# Altium PCB PCB.PcbDoc
Units mil, origin at the board's own origin, x right, y up, seen from the top; angles counter-clockwise.
Board outline 3045.59 x 1683.67 mil, 2 copper layers (Top Layer, Bottom Layer), stack 61.855 mil thick; 72 components, 68 nets, 264 pads, 93 vias.
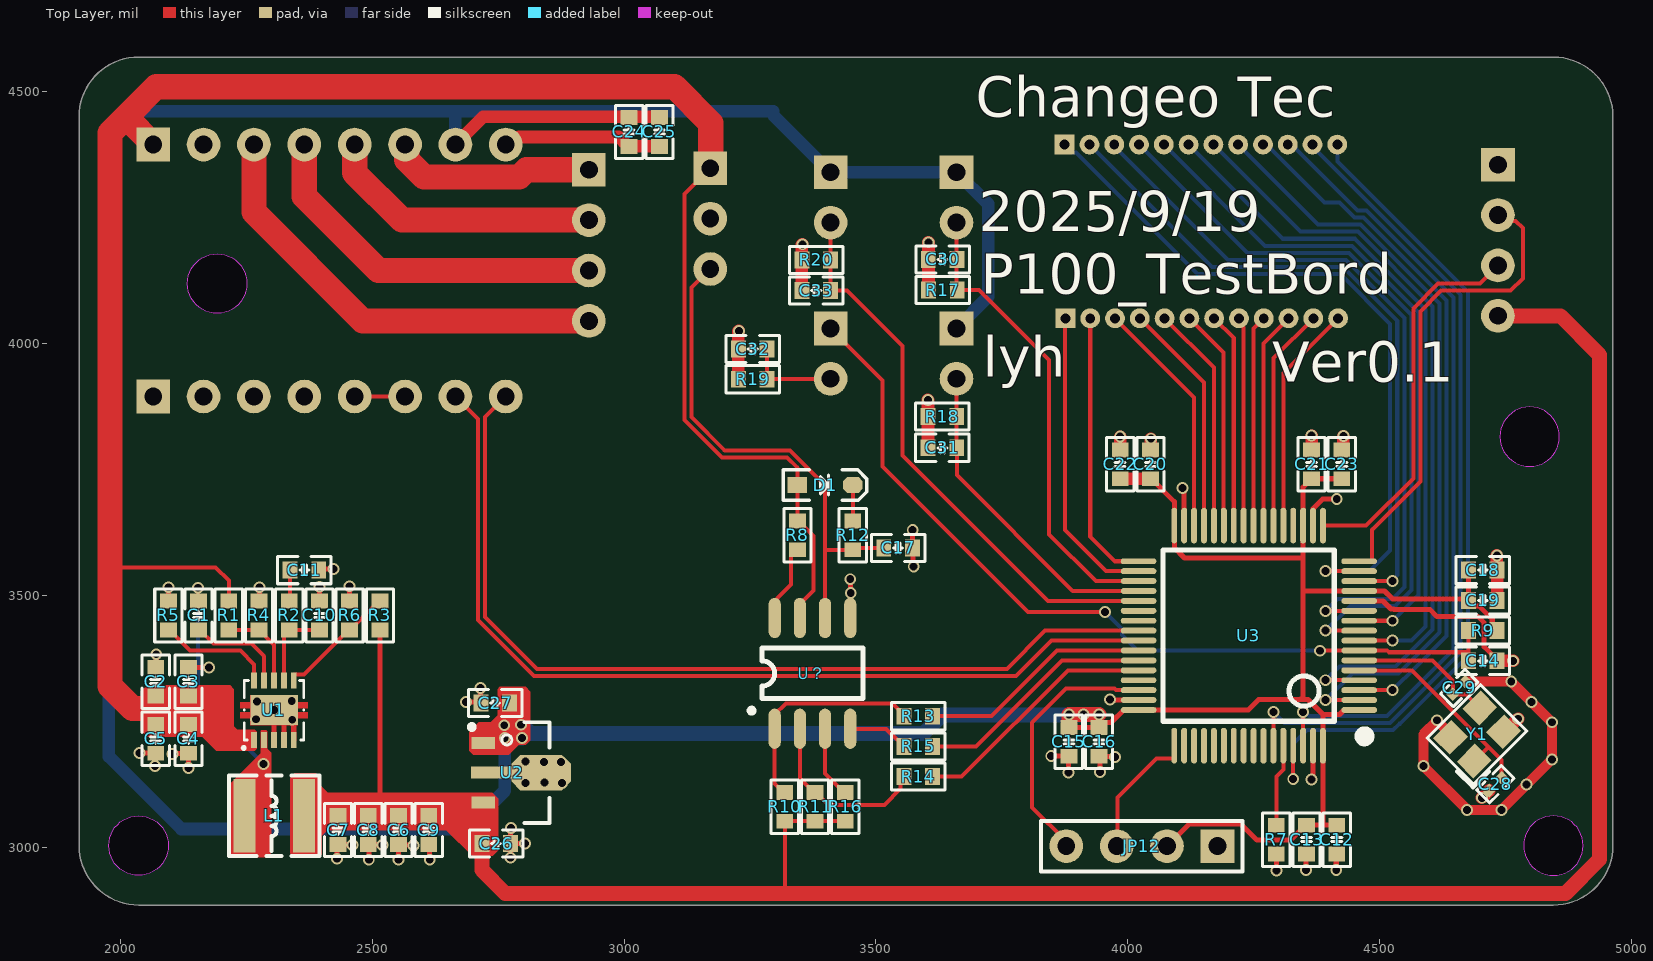
[diagram p0: Top Layer view]
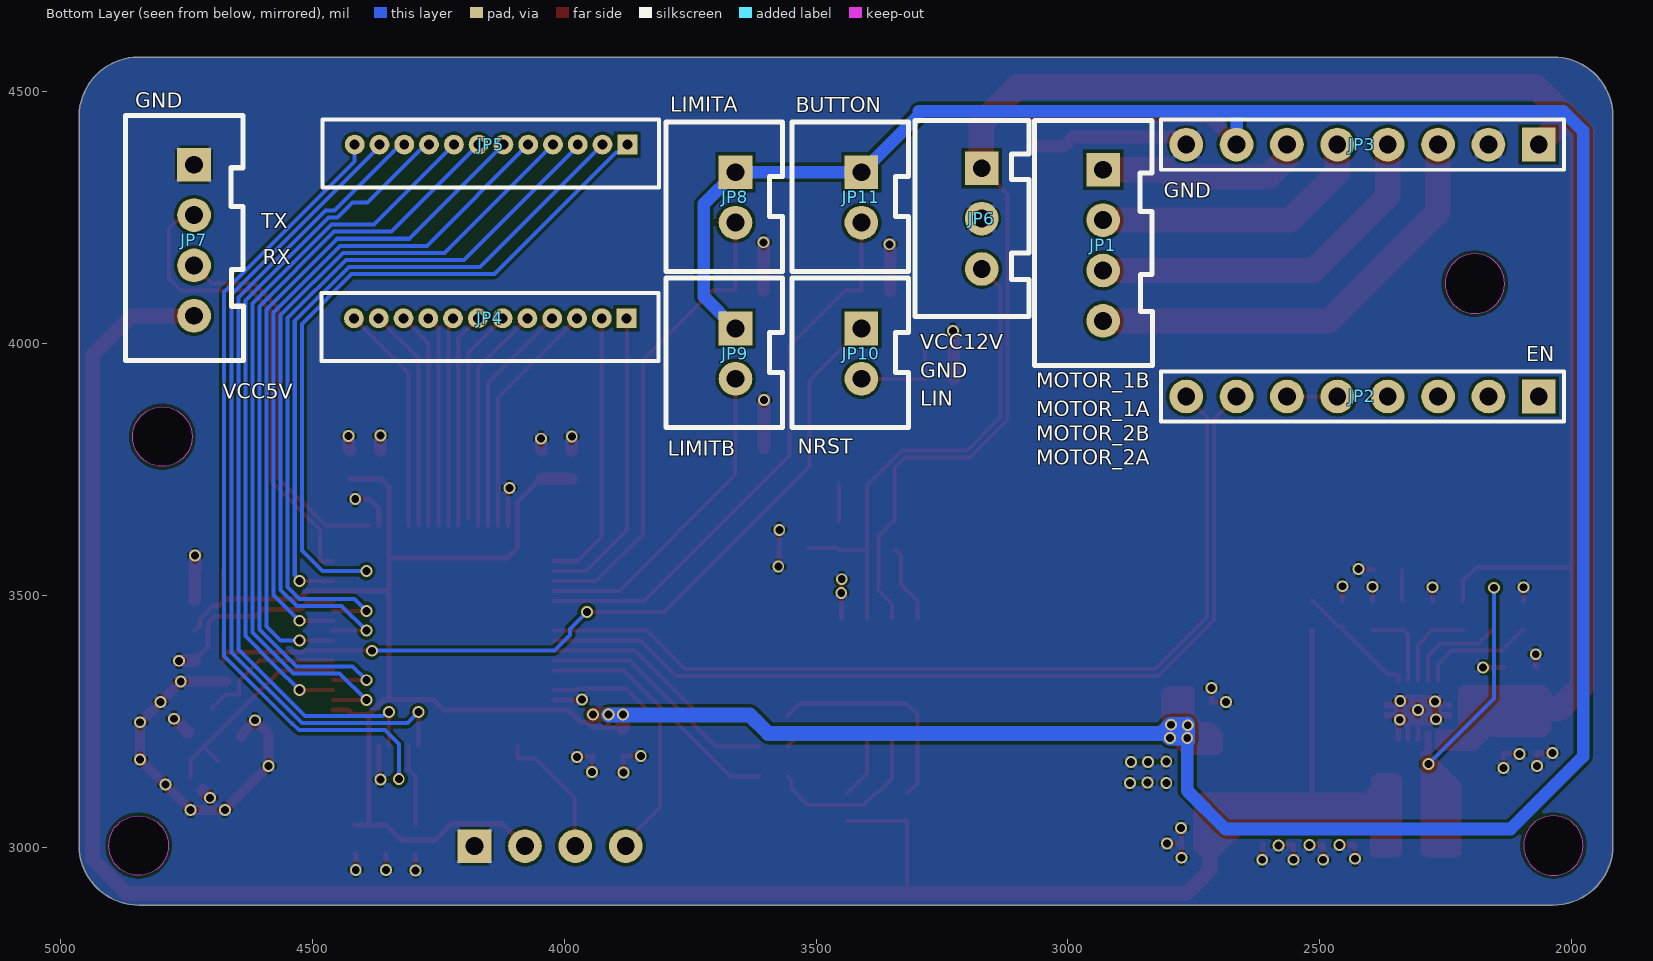
[diagram p1: Bottom Layer view, seen from below]

## Layer stack, top to bottom
Top Solder: solder mask 0.4, Solder Resist, Dk 3.5
Top Layer: signal copper 1.4
Dielectric 1: dielectric 59.0551, FR-4, Dk 4.8
Bottom Layer: signal copper 1.4
Bottom Solder: solder mask 0.4, Solder Resist, Dk 3.5

## Board outline
1917.76,3003.19 1917.76,4450.63 cw(c2035.87,4450.63) 2035.87,4568.74 4845.24,4568.74 cw(c4845.24,4450.63) 4963.35,4450.63 4963.35,3003.19 cw(c4845.24,3003.19) 4845.24,2885.08 2035.87,2885.08 cw(c2035.87,3003.19)
cut-out: 2192,4059.94 cw(c2192,4119) 2132.94,4119 cw(c2192,4119) 2192,4178.06 cw(c2192,4119) 2251.06,4119 cw(c2192,4119)
cut-out: 4738.94,3815 ccw(c4798,3815) 4798,3755.94 ccw(c4798,3815) 4857.06,3815 ccw(c4798,3815) 4798,3874.06 ccw(c4798,3815)
cut-out: 4786.18,3003.19 ccw(c4845.24,3003.19) 4845.24,2944.13 ccw(c4845.24,3003.19) 4904.29,3003.19 ccw(c4845.24,3003.19) 4845.24,3062.24 ccw(c4845.24,3003.19)
cut-out: 2035.87,2944.13 cw(c2035.87,3003.19) 1976.81,3003.19 cw(c2035.87,3003.19) 2035.87,3062.24 cw(c2035.87,3003.19) 2094.92,3003.19 cw(c2035.87,3003.19)

## Design rules (kind name [scope] priority, off if disabled: settings)
Clearance [All] p1: gap=6 ignorepadtopadclearanceinfootprint=FALSE except(0: Arc-Text Arc-Hole Track-Text Track-Hole SMDPad-Text SMDPad-Hole THPad-Text THPad-Hole Via-Text Via-Hole Fill-Text Fill-Hole Poly-Text Poly-Hole Region-Text Region-Hole Text-Text Text-Hole; 10: Via-Via)
PolygonConnect [All] p1: connectstyle=Relief reliefconductorwidth=10 reliefentries=4 polygonreliefangle="45 Angle" airgapwidth=4
RoutingVias [All] p1: holewidth=15.75 width=23.62 viastyle="Through Hole" minholewidth=11.81 minwidth=19.68 maxholewidth=15.75 maxwidth=39.37
SilkToSolderMaskClearance [IsPad] p1: minsilkscreentomaskgap=0 clearancetoexposedcopper=TRUE
SolderMaskExpansion [IsVia] p1: expansion=1 istentingtop=TRUE useseparateexpansions=TRUE expansionbottom=1 istentingbottom=TRUE soldermaskfromhole=TRUE
Width [All] p1: maxlimit=100 minlimit=6 preferedwidth=10
29 further rules are at their usual default settings.

## Classes and differential pairs
component class PWR: C1 C2 C3 C4 C5 C6 C7 C8 C9 C10 C11 C26 C27 L1 R1 R2 R3 R4 R5 R6 U1 U2
component class MCU: C12 C13 C14 C15 C16 C17 C18 C19 C20 C21 C22 C23 C28 C29 D1 R7 R8 R9 R10 R11 R12 R13 R14 R15 R16 U3 U？ Y1
component class Connector: C24 C25 C30 C31 C32 C33 JP1 JP2 JP3 JP4 JP5 JP6 JP7 JP8 JP9 JP10 JP11 JP12 R17 R18 R19 R20

## Components (designator, comment, footprint, x,y, rotation, side; value= is the part's Value field where it differs from the comment)
C1 "100nF/25V" C0603_L 2155,3460 r270 top
C2 "10uF/25V" C0603_L 2070,3328.54 r270 top
C3 "10uF/25V" C0603_L 2135,3328.54 r270 top
C4 "1uF/25V" C0603_L 2135,3215 r90 top
C5 "3.3nF/25V" C0603_L 2070,3215 r90 top
C6 "22uF/16V" C0603_L 2552,3034 r90 top
C7 "22uF/16V" C0603_L 2432,3034 r90 top
C8 "22uF/16V" C0603_L 2492,3034 r90 top
C9 "22uF/16V" C0603_L 2612,3034 r90 top
C10 "68pF/25V" C0603_L 2395,3460 r270 top
C11 "560pF/25V" C0603_L 2365,3550 r180 top
C12 "1uF/10V" C0603_L 4415,3015 r270 top
C13 "1uF/10V" C0603_L 4355,3015 r270 top
C14 "100nF/25V" C0603_L 4705,3370 r180 top
C15 "1uF/10V" C0603_L 3883,3209 r90 top
C16 "1uF/10V" C0603_L 3943,3209 r90 top
C17 "220pF/25V" C0603_L 3544,3594 r180 top
C18 "1uF/10V" C0603_L 4705,3550 r180 top
C19 "10nF/10V" C0603_L 4705,3490 r180 top
C20 "1uF/10V" C0603_L 4045,3760 r270 top
C21 "1uF/10V" C0603_L 4365,3760 r90 top
C22 "1uF/10V" C0603_L 3985,3760 r270 top
C23 "10nF/10V" C0603_L 4425,3760 r90 top
C24 "22uF/16V" C0603_L 3010,4420 r90 top
C25 "2.2uF/16V" C0603_L 3070,4420 r90 top
C26 "330nF/16V" C0603_L 2746,3007 r180 top
C27 "100nF/16V" C0603_L 2744,3286 r0 top
C28 "22pF/16V" C0402_L 4730,3125 r225 top
C29 "22pF/16V" C0402_L 4658,3316 r45 top
C30 "100nF/10V" C0603_L 3632.46,4167 r180 top
C31 "100nF/10V" C0603_L 3632,3793 r180 top
C32 "100nF/10V" C0603_L 3255.46,3989 r180 top
C33 "100nF/10V" C0603_L 3381.46,4105 r180 top
D1 "1N5819" SOD-323 3399,3719 r0 top
JP1 "HDR-1X4" XH2.54-LI-4P 2930,4195 r270 bottom
JP2 "HDR-1X8" HDR2.54-M-LI-8P 2415,3894.8 r0 bottom
JP3 "HDR-1X8" HDR2.54-M-LI-8P 2415,4395 r0 bottom
JP4 "HDR-1X12" MX1.25-L-12P 4147.36,4050 r0 bottom
JP5 "HDR-1X12" MX1.25-L-12P 4145.79,4395 r0 bottom
JP6 "HDR-1X3" XH2.54-LI-3P 3171,4248 r270 bottom
JP7 "HDR-1X4" XH2.54-LI-4P 4735,4205 r270 bottom
JP8 "HDR-1X2" XH2.54-LI-2P 3660,4290 r270 bottom
JP9 "HDR-1X2" XH2.54-LI-2P 3660,3980 r270 bottom
JP10 "HDR-1X2" XH2.54-LI-2P 3410,3980 r270 bottom
JP11 "HDR-1X2" XH2.54-LI-2P 3410,4290 r270 bottom
JP12 "HDR-1X4" HDR2.54-LI-4P 4028,3002 r180 top
L1 "8.2uH" NR4020 2305,3062 r0 top
R1 "10K 1%" R0603_L 2215,3460 r270 top
R2 "18.7K 1%" R0603_L 2335,3460 r90 top
R3 "100K 1%" R0603_L 2515,3460 r90 top
R4 "10K 1%" R0603_L 2275,3460 r90 top
R5 "95.3K 1%" R0603_L 2095,3460 r90 top
R6 "19.1K 1%" R0603_L 2455,3460 r90 top
R7 "10K 1%" R0603_L 4295,3015 r270 top
R8 "0R 1%" R0603_L 3344,3619 r270 top
R9 "10K 1%" R0603_L 4705,3430 r0 top
R10 "2.2K 1%" R0603_L 3319,3080 r270 top
R11 "2.2K 1%" R0603_L 3379,3080 r270 top
R12 "1K 1%" R0603_L 3454,3619 r90 top
R13 "100R 1%" R0603_L 3584,3260 r180 top
R14 "100R 1%" R0603_L 3584,3140 r180 top
R15 "100R 1%" R0603_L 3584,3200 r180 top
R16 "5.1K 1%" R0603_L 3439,3080 r270 top
R17 "10K 1%" R0603_L 3632.91,4106 r180 top
R18 "10K 1%" R0603_L 3632,3855 r180 top
R19 "10K 1%" R0603_L 3255.46,3929 r180 top
R20 "10K 1%" R0603_L 3381.46,4166 r180 top
U1 "TPS54335A-QFN" VSON-10_L3.0-W3.0-P0.50-TL-EP 2304.64,3271.94 r90 top
U2 "78L33" SOT89_L 2732,3148 r270 top
U3 "STM32F103R6TX_LQFP64" "LQFP64 10x10_N" 4240,3420 r90 top
U？ "SI1021T" SOP8 3298,3236 r90 top
Y1 "8Mhz" "OSC 3225-4P" 4693.46,3223.66 r45 top

## Footprints (in the part's own frame and the unit in brackets; to place one, negate y for a bottom-side part, rotate by r counter-clockwise, add the part's x,y. Pads: shape width x height; smd on the part's side, far side on the other; paste and mask are expansions set on the pad)
C0402_L [mm] "贴片MLCC电容"
  rect 0.5x0.5 smd: 1(-0.45,0) 2(0.45,0)
  silkscreen extent -0.87,-0.46 0.88,0.46, body extent -0.5,-0.25 0.5,0.25, height 0.5
C0603_L [mm] "贴片MLCC电容"
  rect 0.75x0.85 smd: 1(-0.725,0) 2(0.725,0)
  silkscreen extent -1.35,-0.69 1.35,0.69, body extent -0.8,-0.4 0.8,0.4, height 0.8
HDR2.54-LI-4P [mm] "排针，4脚"
  rect 1.7x1.7 hole 0.9: 1(-3.81,0)
  round 1.7 hole 0.9: 2(-1.27,0) 3(1.27,0) 4(3.81,0)
  silkscreen extent -5.08,-1.27 5.08,1.27, body extent -5.08,-1.27 5.08,1.27, height 8.5
HDR2.54-M-LI-8P [mm] "排母，8脚"
  rect 1.7x1.7 hole 0.9: 1(-8.89,0)
  round 1.7 hole 0.9: 2(-6.35,0) 3(-3.81,0) 4(-1.27,0) 5(1.27,0) 6(3.81,0) 7(6.35,0) 8(8.89,0)
  silkscreen extent -10.16,-1.27 10.16,1.27, body extent -10.16,-1.27 10.16,1.27, height 8.5
"LQFP64 10x10_N" [mm] "64脚，体宽10x10mm，脚距0.5mm"
  oval 0.3x1.8 smd: 1(-3.75,-5.575) 2(-3.25,-5.575) 3(-2.75,-5.575) 4(-2.25,-5.575) 5(-1.75,-5.575) 6(-1.25,-5.575) 7(-0.75,-5.575) 8(-0.25,-5.575) 9(0.25,-5.575) 10(0.75,-5.575) 11(1.25,-5.575) 12(1.75,-5.575) 13(2.25,-5.575) 14(2.75,-5.575) 15(3.25,-5.575) 16(3.75,-5.575) 33(3.75,5.55) 34(3.25,5.55) 35(2.75,5.55) 36(2.25,5.55) 37(1.75,5.55) 38(1.25,5.55) 39(0.75,5.55) 40(0.25,5.55) 41(-0.25,5.55) 42(-0.75,5.55) 43(-1.25,5.55) 44(-1.75,5.55) 45(-2.25,5.55) 46(-2.75,5.55) 47(-3.25,5.55) 48(-3.75,5.55)
  oval 1.8x0.3 smd: 17(5.55,-3.75) 18(5.55,-3.25) 19(5.55,-2.75) 20(5.55,-2.25) 21(5.55,-1.75) 22(5.55,-1.25) 23(5.55,-0.75) 24(5.55,-0.25) 25(5.55,0.25) 26(5.55,0.75) 27(5.55,1.25) 28(5.55,1.75) 29(5.55,2.25) 30(5.55,2.75) 31(5.55,3.25) 32(5.55,3.75) 49(-5.55,3.75) 50(-5.55,3.25) 51(-5.55,2.75) 52(-5.55,2.25) 53(-5.55,1.75) 54(-5.55,1.25) 55(-5.55,0.75) 56(-5.55,0.25) 57(-5.55,-0.25) 58(-5.55,-0.75) 59(-5.55,-1.25) 60(-5.55,-1.75) 61(-5.55,-2.25) 62(-5.55,-2.75) 63(-5.55,-3.25) 64(-5.55,-3.75)
  silkscreen extent -5.33,-6.09 4.32,4.32, body extent -6,-6 6,6, height 1.45
MX1.25-L-12P [mm] "长：16.75mm，宽：3.2mm，高：4.2mm"
  rect 1x1 hole 0.5: 1(-6.885,0)
  round 1 hole 0.5: 2(-5.635,0) 3(-4.385,0) 4(-3.135,0) 5(-1.885,0) 6(-0.635,0) 7(0.615,0) 8(1.865,0) 9(3.115,0) 10(4.365,0) 11(5.615,0) 12(6.865,0)
  silkscreen extent -8.49,-1.27 8.49,2.16, body extent -8.38,-1.15 8.37,2.05, height 4.25
NR4020 [mm] "4.0mm*4.0mm*2.0mm(长*宽*高）"
  rect 1.1x3.7 smd: 1(-1.5,0) 2(1.5,0)
  silkscreen extent -2.29,-2.03 2.29,2.03, body extent -2,-2 2,2, height 2.1
"OSC 3225-4P" [mm] "3.2*2.5*0.7mm(长宽高)"
  rect 1.3x1.2 smd: 1(-1.05,-0.85) 2(1.05,-0.85) 3(1.05,0.85) 4(-1.05,0.85)
  silkscreen extent -2.03,-1.75 1.9,1.65, body extent -1.6,-1.25 1.6,1.25, height 0.7
R0603_L [mm] "1/10W贴片电阻"
  rect 0.75x0.85 smd: 1(-0.725,0) 2(0.725,0)
  silkscreen extent -1.35,-0.69 1.35,0.69, body extent -0.8,-0.4 0.8,0.4, height 0.4
SOD-323 [mm] "1.8x1.3X0.9mm（长宽高，不包括引脚）"
  rect 1x0.8 smd: 1(-1.4,0)
  oct 1x0.8 smd: 2(1.4,0)
  silkscreen extent -2.11,-0.76 2.11,0.76, body extent -1.34,-0.63 1.31,0.67, height 1
SOP8 [mil] "联系卖家 免费查找封装"
  oval 80x24 smd: 1(-1,-1) 2(-1,-51) 3(-1,-101) 4(-1,-151) 5(219,-151) 6(219,-101) 7(219,-51) 8(219,-1)
  silkscreen extent 30,-176 159,50, body extent -12,-173 225,24, height 75
SOT89_L [mm] "4.6x4.3x1.6mm(长宽高)"
  rect 0.6x1.2 smd: 1(-1.5,-0.303) 3(1.5,-0.303)
  oct 1.8x3 smd: 2(0,2.616)
  rect 0.6x2.1 smd: 2(0,0.127)
  silkscreen extent -2.54,-1 2.54,3.05, body extent -2.3,-0.88 2.3,3.42, height 1.6
VSON-10_L3.0-W3.0-P0.50-TL-EP [mm]
  rect 0.8x0.3 smd: 1(-1.5,1) 2(-1.5,0.5) 3(-1.5,0) 4(-1.5,-0.5) 5(-1.5,-1) 6(1.5,-1) 7(1.5,-0.5) 8(1.5,0) 9(1.5,0.5) 10(1.5,1)
  rect 1.52x2.4 smd: 11(0.002,-0.009)
  Top Layer region: -0.758,1.191 -0.398,1.191 -0.398,1.706 -0.098,1.706 -0.098,1.191 0.102,1.191 0.102,1.706 0.402,1.706 0.402,1.191 0.761,1.191 0.761,-1.209 0.402,-1.209 0.402,-1.714 0.102,-1.714 0.102,-1.209 -0.098,-1.209 -0.098,-1.714 -0.398,-1.714 -0.398,-1.209 -0.759,-1.209 -0.759,0.886 -0.758,0.886 -0.758,1.191
  silkscreen extent -1.98,-1.5 1.5,1.6, body extent -1.51,-1.52 1.51,1.5, height 0.61
XH2.54-LI-2P [mm] "接插件，2P"
  rect 1.7x1.7 hole 0.9: 1(-1.27,0)
  round 1.7 hole 0.9: 2(1.27,0)
  silkscreen extent -3.81,-3.51 3.74,2.37, body extent -3.77,-3.3 3.77,2.4, height 7.05
XH2.54-LI-3P [mm] "接插件，3P"
  rect 1.7x1.7 hole 0.9: 1(-2.54,0)
  round 1.7 hole 0.9: 2(0,0) 3(2.54,0)
  silkscreen extent -4.95,-3.38 4.93,2.39, body extent -5.04,-3.3 5.04,2.4, height 7.03
XH2.54-LI-4P [mm] "接插件，4P"
  rect 1.7x1.7 hole 0.9: 1(-3.81,0)
  round 1.7 hole 0.9: 2(-1.27,0) 3(1.27,0) 4(3.81,0)
  silkscreen extent -6.3,-3.45 6.07,2.49, body extent -6.31,-3.3 6.31,2.4, height 7.03

## Part data
C1 C2 C3 C4 C5 C6 C7 C8 C9 C10 C11 C12 C13 C14 C15 C16 C17 C18 C19 C20 C21 C22 C23 C24 C25 C26 C27 C28 C29 C30 C31 C32 C33: library part C, "无极性贴片电容", BOM名称=无极性贴片电容, 学习资源=www.ooocke.com, 材质=X7R, 版权归属=源创客
D1: "肖特基二极管", BOM名称=肖特基二极管, 学习资源=www.ooocke.com, 属性=40V/2A, 版权归属=源创客
JP1 JP7 JP12: library part "Header 4", "4P接插件", BOM名称=4P接插件, 学习资源=www.ooocke.com, 版权归属=源创客
JP2 JP3: library part "Header 8", "8P接插件", BOM名称=8P接插件, 学习资源=www.ooocke.com, 版权归属=源创客
JP4 JP5: library part "Header 12", "12P接插件", BOM名称=12P接插件, 学习资源=www.ooocke.com, 版权归属=源创客
JP6: library part "Header 3", "3P接插件", BOM名称=3P接插件, 学习资源=www.ooocke.com, 版权归属=源创客
JP8 JP9 JP10 JP11: library part "Header 2", "2P接插件", BOM名称=2P接插件, 学习资源=www.ooocke.com, 版权归属=源创客
L1: library part L, "小功率贴片电感", BOM名称=小功率贴片电感, 学习资源=www.ooocke.com, 版权归属=源创客
R1 R2 R3 R4 R5 R6 R7 R8 R9 R10 R11 R12 R13 R14 R15 R16 R17 R18 R19 R20: library part R, "贴片电阻", BOM名称=贴片电阻, 学习资源=www.ooocke.com, 版权归属=源创客
U1: "BUCK"
U？: "SI1021T LIN收发器"
Y1: library part Crystal

## Via types
v1: diameter 23.62, hole 15.75, Top Layer to Bottom Layer, 93 vias

## Nets (pads, with @x,y where several pads share a name; then routed paths per layer and width w, separated by ;. In a path a pad name is that pad's centre, name@x,y a point inside that pad or via, vN(x,y) a via of type N, cw(c..) or ccw(c..) an arc to the next point about the centre after c; other vN are vias at no path point)
A4988_DIR: JP2.8 U3.40 | length 1826.5
  Top Layer w8: JP2.8 2724,3853.8 2724,3456.8 2826.8,3354 3760,3354 3835.84,3429.84 U3.40
A4988_EN: JP2.1
A4988_MS1: JP2.2
A4988_MS2: JP2.3
A4988_MS3: JP2.4
A4988_RST: JP2.5 JP2.6 | length 100
  Top Layer w8: JP2.5 JP2.6
A4988_STEP: JP2.7 U3.41 | length 1849
  Top Layer w8: JP2.7 2710,3849.8 2710,3451 2821,3340 3778,3340 3848.16,3410.16 U3.41
BOOT: R7.1 U3.60 | length 163.7
  Top Layer w8: R7.1 4295,3140.17 4308.9,3154.06 U3.60
Button: C33.1 JP11.2 R20.1 U3.37 | length 1128.8
  Top Layer w8: JP11.2 C33.1 3443,4105 3553,3995 3553,3778 3842.1,3488.9 U3.37
GND: C2.1 C3.1 C4.1 C5.1 C6.1 C7.1 C8.1 C9.1 C10.1 C11.1 C12.2 C13.2 C14.1 C15.1 C16.1 C17.1 C18.1 C19.1 C20.1 C21.2 C22.1 C23.2 C24.1 C25.1 C26.1 C27.1 C28.2 C29.2 C30.2 C31.2 C32.2 C33.2 JP3.2 JP3.8 JP6.2 JP7.1 JP12.1 R4.2 R5.2 R6.2 R7.2 R17.2 R18.2 R19.2 R20.2 U1.3 U1.4 U1.5 U1.11 U2.2 U3.12 U3.18 U3.31 U3.47 U3.63 U？.5 Y1.2 Y1.4 | length 3620.3
  Top Layer w10: v1(2038,3187) 2038.27,3186.73 2069.73,3186.73 C5.1 2068.43,3184.89 v1(2068.43,3161.43) ; C2.1 2071,3358.09 v1(2071,3383) ; R5.2 v1(2095,3516) ; v1(2103,3185) 2103.73,3185.73 2134.27,3185.73 C4.1 v1(2135,3157) ; C3.1 2175.72,3357.09 v1(2175.81,3357) ; R4.2 2276,3489.54 v1(2276,3516) ; U1.3 2304.65,3257.65 U1.11@2306,3259 ; U1.11@2320,3268 2324.33,3263.67 U1.4 ; U1.11@2334,3271 2344.02,3260.98 U1.5 ; C11.1 2395.54,3552 v1(2423,3552) ; C10.1 v1(2395,3517) ; v1(2430,2977) 2430,3003.46 C7.1 2432.73,3004.73 2460.27,3004.73 v1(2461,3004) ; R6.2 v1(2455,3518) ; C8.1 C8.1@2492.73,3004.73 ; v1(2493,2975) 2493,3004.46 C8.1@2492.73,3004.73 ; v1(2520,3004) 2519.27,3004.73 C8.1@2492.73,3004.73 ; v1(2552,2975) C6.1 2553.23,3004.23 2580.77,3004.23 v1(2582,3003) ; C9.1 2614,3003.46 v1(2614,2975) ; v1(2686,3288) 2713.46,3288 C27.1@2715.23,3286.23 ; v1(2715,3316) 2715.23,3315.77 C27.1@2715.23,3286.23 ; C27.1 C27.1@2715.23,3286.23 ; v1(2774,2979) 2774.27,2979.27 2774.27,3006.73 C26.1 ; v1(2775,3038) 2774.77,3037.77 2774.77,3007.23 C26.1 ; v1(2803,3007) C26.1 ; U？.5 3449.5,3455.5 3449.5,3504.5 v1(3450,3505) 3449.5,3505.5 3449.5,3531.5 v1(3449,3532) ; v1(3573,3630) 3572.77,3629.77 3572.77,3594.23 C17.1 3573.77,3592.77 3573.77,3558.23 v1(3575,3557) ; v1(3848,3181) 3848.27,3180.73 3882.73,3180.73 C15.1 3882,3179.46 v1(3882,3148) ; C16.1 C16.1@3943.73,3179.73 ; v1(3945,3149) 3945,3178.46 C16.1@3943.73,3179.73 ; v1(3965,3293) 3965.61,3292.39 4021.15,3292.39 U3.47 ; v1(3975,3179) 3974.27,3179.73 C16.1@3943.73,3179.73 ; v1(4109,3713) 4109,3709.31 4112.05,3706.27 U3.31 ; v1(4295,2954) R7.2 ; v1(4354,2955) 4354,2985.46 C13.2 ; v1(4364.83,3134) 4364.83,3137.69 4367.95,3140.81 U3.63 ; U3.18 4368.3,3638.85 4368.3,3672.6 4386.7,3691 v1(4415,3691) ; v1(4414,2955) 4414,2985.46 C12.2 ; U3.12 4506.99,3488.9 4522.89,3473 4528,3473 4528.71,3472.29 4599.65,3472.29 4614.21,3457.73 4695.78,3457.73 4707.78,3445.73 4707.78,3397.73 4733.54,3371.97 C14.1
  Top Layer w20: v1(4614,3252) v1@4614,3251.02 ; Y1.4 4640.57,3224.45 v1@4614,3251.02 ; C29.2 v1(4761.47,3328.53) v1(4842,3248) v1(4842,3174) v1(4742,3074) v1(4674,3074) v1(4587,3161) 4587,3224.02 v1@4614,3251.02
  Top Layer w25: JP3.8 2776.35,4395 2791.35,4410 2989.49,4410 3005.77,4393.72 3007.74,4393.72 C24.1 C25.1 ; R19.2 C32.2 3226.91,4023.91 v1(3228,4025) ; C33.2 3352.91,4195.91 v1(3354,4197) ; v1(3603,3888) 3603.46,3887.54 C31.2 ; v1(3604,4201) 3604.37,4200.63 R17.2 ; C22.1 v1(3985,3815) ; C20.1 4046,3789.54 v1(4046,3811) ; C21.2 v1(4365,3817) ; C23.2 4425.74,3788.54 4428,3790.81 v1(4428,3816) ; v1(4703,3098) C28.2 ; v1(4733,3579) 4733,3550.54 C18.1 C19.1 ; C14.1 v1(4765,3370) ; Y1.2 4749.23,3229.23 v1(4775,3255)
  other v1: 4792,3124 2804.56,3127 2876.56,3127 2841.56,3128 2840.56,3169 2874.56,3169 2804.56,3170 2341.09,3252.91 2269.09,3253.91 2305.09,3271.91 4801.74,3288.26 2271.09,3288.91 2340.09,3289.91
Limit_A: C30.1 JP8.2 R17.1 U3.35 | length 936.6
  Top Layer w8: JP8.2 3660,4107.46 R17.1 3705,4106 3844,3967 3844,3621 3936.73,3528.27 U3.35
Limit_B: C31.1 JP9.2 R18.1 U3.36 | length 647.7
  Top Layer w8: JP9.2 3660,3803.54 3660.54,3803 C31.1 3660.54,3738.81 3890.77,3508.58 U3.36
LIN_BUS: C17.2 JP6.3 R12.1 U？.6 | length 1011.7
  Top Layer w8: JP6.3 3134,4111 3134,3853.8 3199.8,3788 3329,3788 3399,3718 3399,3590.46 ; U？.6 3399,3590.46 ; C17.2 3457.54,3594 R12.1 3399,3590.46
MOTOR_1A: JP1.2 JP3.5 | length 559.9
  Top Layer w50: JP3.5 2465,4339 2559,4245 JP1.2
MOTOR_1B: JP1.1 JP3.6 | length 413.3
  Top Layer w50: JP3.6 2568.24,4391.76 2568.24,4365.05 2602.75,4330.54 2791.7,4330.54 2806.17,4345 JP1.1
MOTOR_2A: JP1.3 JP3.4 | length 728.9
  Top Layer w50: JP3.4 2365,4292 2512,4145 JP1.3
MOTOR_2B: JP1.4 JP3.3 | length 888.5
  Top Layer w50: JP3.3 2265,4261 2481,4045 JP1.4
NetC1_1: C1.1 L1.1 U1.2 | length 479
  Top Layer w8: v1(2154,3515) 2154,3489.54 C1.1 ; v1(2284,3165) 2284.48,3165.48 2284.48,3212.41 U1.2
  Bottom Layer w8: v1(2154,3515) 2154,3295 v1(2284,3165)
NetC1_2: C1.2 U1.9 | length 199.7
  Top Layer w8: C1.2 2156.97,3431.46 2184.43,3404 2260,3404 2284.96,3379.04 U1.9
NetC10_2: C10.2 R2.1 U1.7 | length 164.9
  Top Layer w8: U1.7 2324.33,3420.79 R2.1 C10.2
NetC11_2: C11.2 R2.2 | length 62.1
  Top Layer w8: R2.2 2336.46,3490 C11.2
NetC32_1: C32.1 JP10.2 R19.1 | length 186.4
  Top Layer w8: C32.1 R19.1 3285,3930 JP10.2
NetD1_2: D1.2 R12.2 | length 71.5
  Top Layer w8: R12.2 3454.12,3647.66 D1.2
NetR1_2: R1.2 R4.1 U1.8 | length 173.9
  Top Layer w8: R1.2 R4.1 2276.97,3431.46 2287.73,3420.69 2287.73,3418.72 2304.65,3401.81 U1.8
NetR5_1: R5.1 U1.10 | length 230.5
  Top Layer w8: R5.1 2096.97,3431.46 2138.43,3390 2238,3390 2265.28,3362.72 U1.10
NetR8_2: R8.2 U？.8 | length 155.2
  Top Layer w8: U？.8 3299,3487.33 3304.97,3493.3 3304.97,3494.97 3331.27,3521.27 3331.27,3579.69 3342.03,3590.46 R8.2
NetR10_1: R10.1 R13.2 U？.1 | length 441
  Top Layer w8: R10.1 3317.03,3108.54 3299,3126.57 U？.1 3299,3263 3321,3285 3532.43,3285 3555.46,3261.97 R13.2
NetR11_1: R11.1 R14.2 U？.2 | length 360.3
  Top Layer w8: U？.2 3349,3136.57 3377.03,3108.54 R11.1 3380.97,3108.54 3405.73,3083.78 3516.78,3083.78 3548.95,3115.95 3548.95,3133.5 R14.2
NetR15_2: R15.2 U？.4 | length 122.1
  Top Layer w8: U？.4 3520.46,3235 3542.72,3212.73 3544.69,3212.73 3555.46,3201.97 R15.2
NetR16_1: R16.1 U？.3 | length 144.2
  Top Layer w8: U？.3 3399,3146.57 3437.03,3108.54 R16.1
NRST: C14.2 JP10.1 R9.1 U3.7 | length 1699.6
  Top Layer w8: JP10.1 3513,3927 3513,3756 3801.91,3467.09 v1(3955,3467.09) ; v1(4382,3390) 4382.24,3390.24 4459.27,3390.24 U3.7 4514.8,3390.47 4518.27,3387 4672.73,3387 4674.49,3385.25 4676.46,3385.25 C14.2 ; 4676.46,3387 R9.1
  Bottom Layer w8: v1(3955,3467.09) 3988.82,3433.27 3988.82,3420.83 4019.65,3390 v1(4382,3390)
PART1_ID1: JP5.1 U3.15 | length 1455.4
  Top Layer w8: v1(4393,3548) U3.15
  Bottom Layer w8: JP5.1 3890.41,4379.31 3897.64,4379.31 4138.96,4138 4422,4138 4521.13,4038.87 4521.13,3589.13 4480,3548 v1(4393,3548)
PART1_ID2: JP5.2 U3.14 | length 1343.1
  Top Layer w8: U3.14@4459.53,3528.24 v1(4526.01,3528.22)
  Bottom Layer w8: JP5.2 4166.94,4152 4427.8,4152 4535.13,4044.66 4535.13,3540.72 4526.01,3531.59 v1(4526.01,3528.22)
PART1_ID3: JP5.3 U3.11 | length 1496.5
  Top Layer w8: v1@4393.02,3469.24 U3.11
  Bottom Layer w8: JP5.3 3973.15,4391.85 4199,4166 4433.6,4166 4549.13,4050.46 4549.13,3516.82 4525.31,3493 4416.74,3493 v1(4393,3469.26)
PART2_ID1: JP4.10 U3.23 | length 432.1
  Top Layer w8: U3.23 4269.53,4000.31 JP4.10
PART2_ID2: JP4.11 U3.22 | length 444.3
  Top Layer w8: U3.22 4289.21,3970.79 JP4.11
PART2_ID3: JP4.12 U3.21 | length 456.5
  Top Layer w8: U3.21 4308.9,3941.26 JP4.12
PART3_ID1: JP5.4 U3.9 | length 1496.6
  Top Layer w8: v1(4393,3429.89) U3.9@4459.48,3429.87
  Bottom Layer w8: JP5.4 4237.36,4180 4439.4,4180 4554.01,4065.39 4563.13,4056.26 4563.13,3511.02 4531.11,3479 4442.11,3479 v1(4393,3429.89)
PART3_ID2: JP5.5 U3.10 | length 1343.7
  Top Layer w8: U3.10 v1(4526.01,3449.48)
  Bottom Layer w8: JP5.5 4272.57,4194 4445.2,4194 4577.13,4062.06 4577.13,3500.61 v1(4526.01,3449.48)
PART3_ID3: JP5.6 U3.8 | length 1378.7
  Top Layer w8: U3.8@4459.53,3410.13 v1(4525.98,3410.13)
  Bottom Layer w8: JP5.6 4307.79,4208 4450.99,4208 4591.13,4067.86 4591.13,3438.26 4563,3410.13 v1(4525.98,3410.13)
PART4_ID1: JP4.7 U3.26 | length 427.6
  Top Layer w8: JP4.7 4210.47,4011.1 U3.26
PART4_ID2: JP4.8 U3.25 | length 415.4
  Top Layer w8: JP4.8 4220.79,4041.51 4230.16,4032.14 U3.25
PART4_ID3: JP4.9 U3.24 | length 419.8
  Top Layer w8: U3.24 4249.84,4029.84 JP4.9
PART5_ID1: JP5.7 U3.4 | length 1529.9
  Top Layer w8: v1@4393.02,3331.44 U3.4
  Bottom Layer w8: JP5.7 4343,4222 4456.79,4222 4605.13,4073.66 4605.13,3432.47 4531.67,3359 4420.54,3359 v1(4393,3331.46)
PART5_ID2: JP5.8 U3.2 | length 1531.8
  Top Layer w8: v1(4393,3292.09) U3.2@4459.48,3292.07
  Bottom Layer w8: JP5.8 4378.21,4236 4462.59,4236 4619.13,4079.46 4619.13,3426.67 4537.47,3345 4445.91,3345 v1(4393,3292.09)
PART5_ID3: JP5.9 U3.3 | length 1377.5
  Top Layer w8: U3.3 v1(4526.01,3311.68)
  Bottom Layer w8: JP5.9 4275.66,4395 4390.66,4280 4420.07,4280 4450.07,4250 4468.39,4250 4633.13,4085.26 4633.13,3418.93 4572.92,3358.71 4572.92,3358.59 v1(4526.01,3311.68)
PART6_ID1: JP4.4 U3.29 | length 464.3
  Top Layer w8: JP4.4 4151.42,3922.52 U3.29
PART6_ID2: JP4.5 U3.28 | length 452.1
  Top Layer w8: JP4.5 4171.1,3952.05 U3.28
PART6_ID3: JP4.6 U3.27 | length 423.9
  Top Layer w8: JP4.6@4122.21,4049.85 4190,3982.06 U3.27@4190,3654
PART7_ID1: JP5.10 U3.62 | length 1577.5
  Top Layer w8: U3.62 v1(4348.31,3268)
  Bottom Layer w8: JP5.10 4324.87,4395 4455.87,4264 4474.19,4264 4647.13,4091.06 4647.13,3392.13 4515.19,3260.19 4360.35,3260.19 4352.54,3268 v1(4348.31,3268)
PART7_ID2: JP5.11 U3.59 | length 1636
  Top Layer w8: U3.59 v1@4289.24,3267.98
  Bottom Layer w8: v1(4289.26,3268) 4311.07,3246.19 4520.99,3246.19 4661.13,3386.34 4661.13,4096.85 4366.85,4391.14 JP5.11
PART7_ID3: JP5.12 U3.61 | length 1678.2
  Top Layer w8: v1@4328.56,3135.02 U3.61
  Bottom Layer w8: v1(4328.54,3134.99) 4328.54,3204.54 4356.19,3232.19 4526.79,3232.19 4539.6,3245 4541,3245 4675.13,3379.13 4675.13,4102.65 4416.06,4361.73 JP5.12
PART8_ID1: JP4.1 U3.34 | length 601
  Top Layer w8: JP4.1 3875,4048.7 3875,3630 3957.05,3547.95 U3.34
PART8_ID2: JP4.2 U3.33 | length 549.7
  Top Layer w8: JP4.2 3925.51,3616.49 3974.36,3567.64 U3.33
PART8_ID3: JP4.3 U3.30 | length 476.5
  Top Layer w8: JP4.3 4074,3950.72 4131.73,3892.99 U3.30
Screen_RX: JP7.3 U3.17 | length 759.2
  Top Layer w8: U3.17 4473.5,3638.5 4567,3732 4567,4069.8 4616.2,4119 4699,4119 JP7.3
Screen_TX: JP7.2 U3.16 | length 952
  Top Layer w8: U3.16 4483.24,3567.64 4485,3569.4 4485,3630.2 4581,3726.2 4581,4064 4622,4105 4760.45,4105 4785,4129.55 4785,4229 4770.28,4243.72 4746.28,4243.72 JP7.2
SI1021_RX: R13.1 U3.42 | length 463
  Top Layer w8: R13.1 3729,3260 3859.47,3390.47 U3.42
SI1021_SLP: R14.1 U3.44 | length 496.4
  Top Layer w8: R14.1 3670,3140 3881,3351 4021.39,3351 U3.44
SI1021_TX: R15.1 U3.43 | length 479.7
  Top Layer w8: R15.1 3699,3200 3869.79,3370.79 U3.43
SWCLK: JP12.3 U3.49 | length 266.6
  Top Layer w8: JP12.3 3980,3004 3980,3099 4056.97,3175.97 4090.6,3175.97 4092.36,3177.73 U3.49
SWDIO: JP12.4 U3.46 | length 514
  Top Layer w8: JP12.4 3878,3011 3810,3079 3810,3247 3877.81,3314.81 3974.03,3314.81 3977.11,3311.73 U3.46
VCC3V3: C12.1 C13.1 C15.2 C16.2 C18.2 C19.2 C20.2 C21.1 C22.2 C23.1 C24.2 C25.2 C27.2 JP3.7 JP8.1 JP9.1 JP11.1 JP12.2 R9.2 U2.1 U3.1 U3.13 U3.19 U3.32 U3.48 U3.64 | length 8973.1
  Top Layer w10: C15.2 3913,3237.54 ; v1(3912,3263) 3913,3262 3913,3237.54 ; v1(3943,3263) C16.2 ; C20.2 4046.97,3731.46 4092.36,3686.06 4092.36,3594.75 4112.86,3574.25 4348.27,3574.25 ; JP12.2 4122.46,3046.46 4223.84,3046.46 4256.3,3014 4323.49,3014 4353.03,3043.54 C13.1 4385,3043.54 ; C12.1 4385,3043.54 ; C23.1 C21.1 4363.03,3731.46 4353.27,3721.69 4353.27,3719.72 4348.27,3714.72 U3.19 4348.27,3574.25 ; U3.1 4429.49,3272.36 4420.49,3263.36 4387.64,3263.36 ; C19.2@4673.46,3493 4525.52,3493 4509.94,3508.58 U3.13 4349.69,3508.58 4348.27,3510 ; C19.2 4676.46,3488.18 4686.22,3478.42 4697.72,3478.42 4723.78,3452.36 4723.78,3439.76 R9.2 ; C19.2@4676.46,3493 C18.2 ; 3913,3237.54 C16.2 ; C16.2 3952.76,3247.31 3966.91,3247.31 3991.97,3272.36 U3.48 4239.36,3272.36 4260,3293 4343,3293 ; 4343,3293 4358,3293 4387.64,3263.36 ; 4343,3293 4348.27,3298.27 4348.27,3510 ; 4348.27,3510 4348.27,3574.25 ; 4385,3043.54 4387.64,3046.18 U3.64 4387.64,3263.36
  Top Layer w25: JP3.7 2720.54,4450.54 2850,4450.54 ; 2911,4450.54 2850,4450.54 ; C25.2 3068,4450.54 2850,4450.54 ; C22.2 C20.2
  Top Layer w30: C15.2 v1(3883,3263) v1(3912,3263) v1(3943,3263)
  Bottom Layer w25: JP3.7 2665,4461 ; v1@2763,3211 2763,3112 2687,3036 2121,3036 1977,3180 1977,4422 2016,4461 3296.02,4461 3296.02,4453.98 JP11.1 JP8.1 3723,4277 3723,4093 JP9.1
  Bottom Layer w30: v1@2763,3211 v1(2763,3217) ; v1@3912,3262 3631,3262 3595,3226 2814,3226 ; v1(2763,3217) 2763,3244 2764,3243 v1(2795,3243) 2797,3243 2814,3226 ; v1(2763,3217) v1(2797,3217) 2806,3226 2814,3226
  other v1: 2762,3242
VCC5V: C6.2 C7.2 C8.2 C9.2 C26.2 JP7.4 L1.2 R3.1 R10.2 R11.2 R16.2 U2.3 | length 4189.2
  Top Layer w8: 3317,2908 3319,2910 R10.2 R11.2 R16.2
  Top Layer w10: R3.1 2515,3074 2524,3065
  Top Layer w30: C26.2 2717.69,3006.76 2717.69,2954.31 2764,2908 3317,2908 4869,2908 4937,2976 4937,3977 4859,4055 JP7.4
VCC12V: C2.2 C3.2 C4.2 C5.2 D1.1 JP3.1 JP6.1 R1.1 R8.1 U1.1 U？.7 | length 4097.8
  Top Layer w8: 1979,3555 2189,3555 2215,3529 R1.1 ; C2.2@2075,3300 C3.2 ; JP6.1 3120,4297 3120,3848 3194,3774 3323.2,3774 3343.88,3753.32 D1.1 3343.88,3647.66 R8.1 3345.97,3647.54 3376,3617.51 3376,3510 3349,3483 U？.7
  Top Layer w50: JP3.1 2012.5,4447.5 2012.5,4451.5 ; 2075,3275 2023.62,3275 1979,3319.62 1979,3555 1979,4418 2012.5,4451.5 ; JP6.1 3171,4355.52 3171.94,4356.46 3171.94,4438.06 3100,4510 2071,4510 2012.5,4451.5
VSENSE-A: R3.2 R6.1 U1.6 | length 245.3
  Top Layer w8: U1.6@2343,3328 2343,3339.81 2345.93,3342.74 2364.31,3342.74 2453.03,3431.46 R6.1 ; R6.1@2453,3438 2463.51,3438 2467.73,3442.22 2467.73,3443.24 2513.03,3488.54 R3.2
XIN: C29.1 U3.6 Y1.3 | length 294.2
  Top Layer w8: U3.6 4604.8,3370.79 4645.47,3330.12 C29.1 4672.12,3303.47 Y1.3
XOUT: C28.1 U3.5 Y1.1 | length 432
  Top Layer w8: U3.5 4564.03,3351.1 4716.13,3199 ; Y1.1 4716.13,3199 ; C28.1 4742.53,3172.6 4716.13,3199
pads on no net: U3.20 U3.38 U3.39 U3.45 U3.50 U3.51 U3.52 U3.53 U3.54 U3.55 U3.56 U3.57 U3.58

## Polygon pours and split planes (outlines as drawn)
GND on Bottom Layer "GND_L02_P000" (solid, remove dead copper, pour order 0): 1917.76,3003.19 1917.76,4450.63 cw(c2035.87,4450.63) 2035.87,4568.74 4845.24,4568.74 cw(c4845.24,4450.63) 4963.35,4450.63 4963.35,3003.19 cw(c4845.24,3003.19) 4845.24,2885.08 2035.87,2885.08 cw(c2035.87,3003.19)

## Other copper
Top Layer:
  region net NetC1_1: 2279,3232 2278,3231 2278,3186 2219,3127 2219,2987 2226,2980 2290,2980 2299,2989 2299,3187 2291,3195 2291,3230 2289,3232
  region net VCC3V3: 2753,3318 2749,3314 2749,3262 2735,3248 2711,3248 2692,3229 2692,3191 2700,3183 2771,3183 2791,3203 2805,3203 2814,3212 2814,3309 2805,3318
  region net VCC5V: 2346,3147 2337,3138 2337,2988 2345,2980 2394,2980 2400,2986 2400,3023 2411,3034 2647,3034 2698,2983 2739,2983 2750,2994 2750,3096 2738,3108 2412,3108 2398,3122 2398,3137 2388,3147
  region net VCC12V: 2162,3219 2190,3191 2267,3191 2271,3195 2271,3229 2267,3233 2232,3233 2225,3240 2225,3267 2225,3314 2218,3321 2162,3321
  region net VCC12V: 2053,3321 2040.5,3308.5 2040.5,3231.5 2053,3219 2162,3219 2171,3228 2171,3312 2162,3321

## Silkscreen, mask and mechanical layers (free items; w line width, h text height)
Top Overlay:
  text "Changeo Tec" at 3698,4450.66 h80
  text "2025/9/19" at 3704,4223 h80
  text "P100_TestBord" at 3708,4098.33 h80
  text "lyh" at 3712,3933.66 h80
  text "Ver0.1" at 4287,3924 h80
Bottom Overlay:
  text "GND" at 4852,4468 h30
  text "LIMITA" at 3790,4460 h30
  text "BUTTON" at 3540,4459 h30
  text "GND" at 2810,4289 h30
  text "TX" at 4602,4229 h30
  text "RX" at 4599,4157 h30
  text "VCC12V" at 3293,3989 h30
  text "EN" at 2090,3965 h30
  text "GND" at 3293,3932.5 h30
  text "MOTOR_1B" at 3063,3912 h30
  text "VCC5V" at 4678,3890 h30
  text "LIN" at 3293,3876 h30
  text "MOTOR_1A" at 3063,3856 h30
  text "MOTOR_2B" at 3063,3807 h30
  text "NRST" at 3536,3781 h30
  text "LIMITB" at 3794,3777 h30
  text "MOTOR_2A" at 3063,3759 h30
Mechanical 1:
  circle w0.5: c4798,3815 r59.06
  circle w0.5: c2192,4119 r59.06
  circle w0.5: c4845.24,3003.19 r59.06
  circle w0.5: c2035.87,3003.19 r59.06
  lines w0.5: 1917.76,3003.19 ccw(c2035.87,3003.19) 2035.87,2885.08 4845.24,2885.08 ccw(c4845.24,3003.19) 4963.35,3003.19 4963.35,4450.63 ccw(c4845.24,4450.63) 4845.24,4568.74 2035.87,4568.74 ccw(c2035.87,4450.63) 1917.76,4450.63 1917.76,3003.19